# Allegro board STLINKV3_PINOUT_V10B.brd
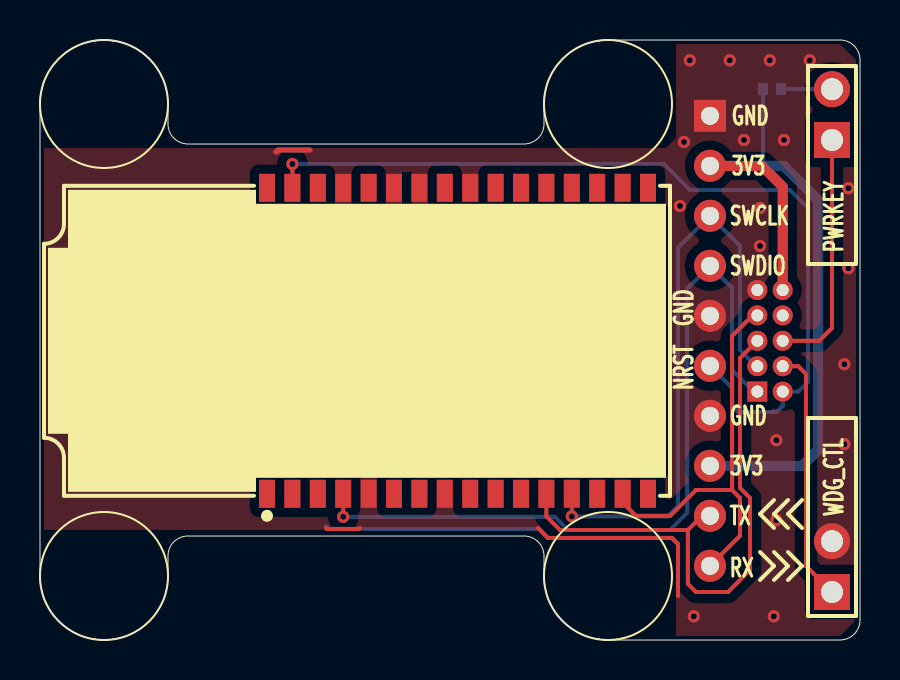
[diagram p0: board, top side]
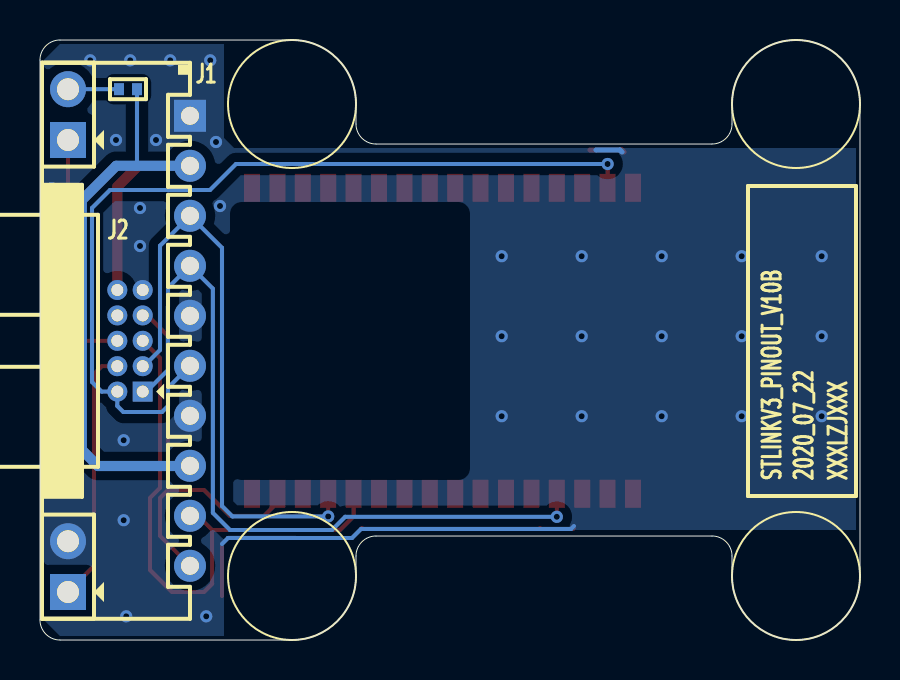
[diagram p1: board, bottom side, seen from below]

Outline 41 x 30 mm; copper layers: TOP, BOTTOM. Coordinates in mm from the lower left corner of the outline.
Outline path: 0,26.8 0,3.2 arc(0.94,0.94) 3.2,0 arc(5.46,0.94) 6.4,3.2 6.4,4.2 arc(6.69,4.91) 7.4,5.2 24.2,5.2 arc(24.91,4.91) 25.2,4.2 25.2,3.2 arc(26.14,0.94) 28.4,0 40,0 arc(40.71,0.29) 41,1 41,29 arc(40.71,29.71) 40,30 28.4,30 arc(26.14,29.06) 25.2,26.8 25.2,25.8 arc(24.91,25.09) 24.2,24.8 7.4,24.8 arc(6.69,25.09) 6.4,25.8 6.4,26.8 arc(5.46,29.06) 3.2,30 arc(0.94,29.06) 0,26.8

## Design rules (mm)
constraint set DEFAULT: min track width 0.203, pair gap 0.203

## Placement (name value [footprint] x y rotation side)
J1  -  [HX25035-10WA]  33.5 14.96 270 bottom
J2  -  [DC3-10P-Z-L]  36.5 14.96 270 bottom
J3  -  [CN1X2-2P54-Z]  39.6 25 90 bottom
J4  -  [CN1X2-2P54-Z]  39.6 2.4 90 bottom
NOREF  -  []  0 0 90 top
NOREF#2  -  []  0 0 0 top
R1  100R  [R0402]  36.6 27.54 180 bottom
U1  -  [STLINK-V3MODS]  31.4 14.96 90 top

## Library data of the parts
J1 = CONN RCPT 10
J2 = DC3-10P-Z-L
J3 J4 = HDR_1
R1 = R_Generic
U1 = STLINK-V3MODS

## Footprints (pads in the part's own frame, mm; a bottom-side part is the same pattern mirrored in y, then rotated)
CN1X2-2P54-Z
  rect 1.8x1.8 hole 1.1: 1(0,0)
  round 1.8 hole 1.1: 2(2.54,0)
DC3-10P-Z-L
  rect 1x1 hole 0.6: 1(2.54,0.635)
  round 1 hole 0.6: 2(2.54,-0.635) 3(1.27,0.635) 4(1.27,-0.635) 5(0,0.635) 6(0,-0.635) 7(-1.27,0.635) 8(-1.27,-0.635) 9(-2.54,0.635) 10(-2.54,-0.635)
HX25035-10WA
  rect 1.6x1.6 hole 0.9: 1(-11.25,0)
  round 1.6 hole 0.9: 2(-8.75,0) 3(-6.25,0) 4(-3.75,0) 5(-1.25,0) 6(1.25,0) 7(3.75,0) 8(6.25,0) 9(8.75,0) 10(11.25,0)
R0402
  rect 0.5x0.6 smd: 1(-0.45,0) 2(0.45,0)
STLINK-V3MODS
  rect 1.4x0.8 smd: 1(-7.65,20.05) 2(-7.65,18.78) 3(-7.65,17.51) 4(-7.65,16.24) 5(-7.65,14.97) 6(-7.65,13.7) 7(-7.65,12.43) 8(-7.65,11.16) 9(-7.65,9.89) 10(-7.65,8.62) 11(-7.65,7.35) 12(-7.65,6.08) 13(-7.65,4.81) 14(-7.65,3.54) 15(-7.65,2.27) 16(-7.65,1) 17(7.65,1) 18(7.65,2.27) 19(7.65,3.54) 20(7.65,4.81) 21(7.65,6.08) 22(7.65,7.35) 23(7.65,8.62) 24(7.65,9.89) 25(7.65,11.16) 26(7.65,12.43) 27(7.65,13.7) 28(7.65,14.97) 29(7.65,16.24) 30(7.65,17.51) 31(7.65,18.78) 32(7.65,20.05)

## Nets
GND: J1.1 J1.5 J1.7 J2.9 J4.2 U1.5 U1.8 U1.24 U1.26 U1.27 U1.29
VCC_3.3V: J1.2 J1.8 J2.10 R1.2
PWRKEY_JUMP: J2.6 J3.1
T_NRST: J1.6 J2.2 U1.31
T_SWCLK: J1.3 J2.3 U1.13
T_SWDIO: J1.4 J2.1 U1.4
T_VCP_RX: J1.10 J2.7 U1.15
T_VCP_TX: J1.9 J2.5 U1.12
WDG_CTL: J2.4(WDG) J4.1
N17238438: J3.2 R1.1

Pads without a net: J2 8; U1 1 2 3 6 7 9 10 11 14 16 17 18 19 20 21 22 23 25 28 30 32

## Via types
v1: diameter 0.61, hole 0.305, TOP to BOTTOM, 36 vias

## Routing (per net, layer and track width the routed paths; a pad name or vN(x,y) marks a point on that pad's centre or on a via; arc(x,y) is an arc through that point)
GND: length 32.7
  TOP w0.203: 14.3,5.6 14.35,5.55 15.95,5.55 16,5.6 ; 24.9,5.6 25.4,5.1 31.6,5.1 31.9,4.8 31.9,2.2
  TOP w0.254: 11.8,24.4 11.9,24.5 13.5,24.5
  BOTTOM w0.203: 31.9,4.8 31.6,5.1 31.59,5.1 28.21,5.1 28.2,5.1 25.4,5.1 24.95,5.55 14.45,5.55 14.3,5.7
  BOTTOM w0.254: 11.9,24.4 12,24.5 13.2,24.5
  vias: v1(1.92,19.19) v1(1.92,15.19) v1(1.92,11.19) v1(5.92,19.19) v1(5.92,15.19) v1(5.92,11.19) v1(9.92,19.19) v1(9.92,15.19) v1(9.92,11.19) v1(13.92,19.19) v1(13.92,15.19) v1(13.92,11.19) v1(17.92,19.19) v1(17.92,15.19) v1(17.92,11.19) v1(32,21.7) v1(32.2,24.9) v1(32.49,28.98) v1(32.69,1.18) v1(34.49,28.98) v1(35.2,25) v1(36,21.6) v1(36,19.7) v1(36.49,28.98) v1(36.69,1.18) v1(36.82,9.99) v1(36.82,5.99) v1(37.2,25) v1(38.49,28.98) v1(40.22,13.79) v1(40.22,9.79) v1(40.42,22.59) v1(40.42,18.59)
VCC_3.3V: length 37.4
  TOP w0.508: J1.2 33.51,23.7 36.1,23.7 37.13,22.66 J2.10
  BOTTOM w0.203: 36.2,23.71 36.15,23.76 R1.2
  BOTTOM w0.508: J1.2 37.19,23.71 38.91,21.99 38.91,9.51 38.1,8.7 33.51,8.7 J1.8
PWRKEY_JUMP: length 12.1
  TOP w0.203: J2.6 38.96,14.96 39.6,15.6 J3.1
T_NRST: length 44
  TOP w0.203: U1.31 v1(12.62,23.8)
  BOTTOM w0.203: v1(12.62,23.8) 31.2,23.8 32.5,22.5 37.5,22.5 38.4,21.6 38.4,12.9 37.92,12.42 J2.2 37.13,11.7 36.83,11.4 34.9,11.4 34.6,11.7 34.6,12.61 J1.6
T_SWCLK: length 30.4
  TOP w0.203: U1.13 v1(26.59,6.18)
  BOTTOM w0.203: J2.3 35.81,13.69 35,14.5 35,19.71 J1.3 31.9,19.61 31.9,6.7 31.38,6.18 v1(26.59,6.18)
T_SWDIO: length 39.2
  TOP w0.203: U1.4 v1(15.16,6.16)
  BOTTOM w0.203: v1(15.16,6.16) 25.74,6.16 26.4,5.5 31.5,5.5 32.36,6.36 32.36,17.57 J1.4 34.6,17.61 34.6,16.67 34.6,16.67 34.6,13.5 35.68,12.42 J2.1
T_VCP_RX: length 20.7
  TOP w0.203: 34.6,7.5 34.6,7.5 34.6,14.17 34.6,14.17 34.6,15.2 35.63,16.23 J2.7 ; 34.6,7.5 35,7.1 35,5.21 J1.10 ; 34.6,7.5 32.8,7.5 31.51,6.21 29.79,6.21 29.13,6.87 U1.15
T_VCP_TX: length 28.3
  TOP w0.203: U1.12 25.32,6.18 26,5.5 32.4,5.5 ; J2.5 35.86,14.96 35,14.1 35,7.6 35.5,7.1 35.5,3.5 34.4,2.4 32.8,2.4 32.4,2.8 32.4,5.5 ; 32.4,5.5 33.11,6.21 J1.9
WDG_CTL: length 12.8
  TOP w0.203: J4.1 38.3,3.7 38.3,13.3 37.91,13.69 J2.4
N17238438: length 2.6
  BOTTOM w0.203: R1.1 J3.2

## Copper pours and planes (outline as drawn; the poured copper is in the pictures)
GND on TOP: 0.2,24.6 31.3,24.6 31.8,25.1 31.8,29.8 40,29.8 40.8,29 40.8,1 40,0.2 31.8,0.2 31.8,5 31.3,5.5 0.2,5.5 ; 1 cut-out
GND on BOTTOM: 0.2,24.6 31.3,24.6 31.8,25.1 31.8,29.8 40,29.8 40.8,29 40.8,1 40,0.2 31.8,0.2 31.8,5 31.3,5.5 0.2,5.5

## Text on the board
Ref Des/Silkscreen Bottom: XXXLZJXXX | 2020_07_22 | STLINKV3_PINOUT_V10B
Ref Des/Silkscreen Top: SWCLK | SWDIO | GND | 3V3 | TX | RX | NRST | PWRKEY | WDG_CTL
DEVICE_TYPE_BOTTOM: FIGURE | FINISHED_SIZE | 0.3048 | 0.6 | 0.9 | 1.1 | DRILL CHART: TOP to BOTTOM | ALL UNITS ARE IN MILLIMETERS | PLATED | QTY | 36 | 1 | 9 | 10 | 4 | 60 | TOTAL HOLES:
